# Altium PCB PCB1 -2Layer.PcbDoc
Units mil, origin at the board's own origin, x right, y up, seen from the top; angles counter-clockwise.
Board outline 4505.03 x 3000.03 mil, 2 copper layers (Component Side, Bottom Layer), stack 12.8 mil thick; 48 components, 53 nets, 188 pads, 5 vias.
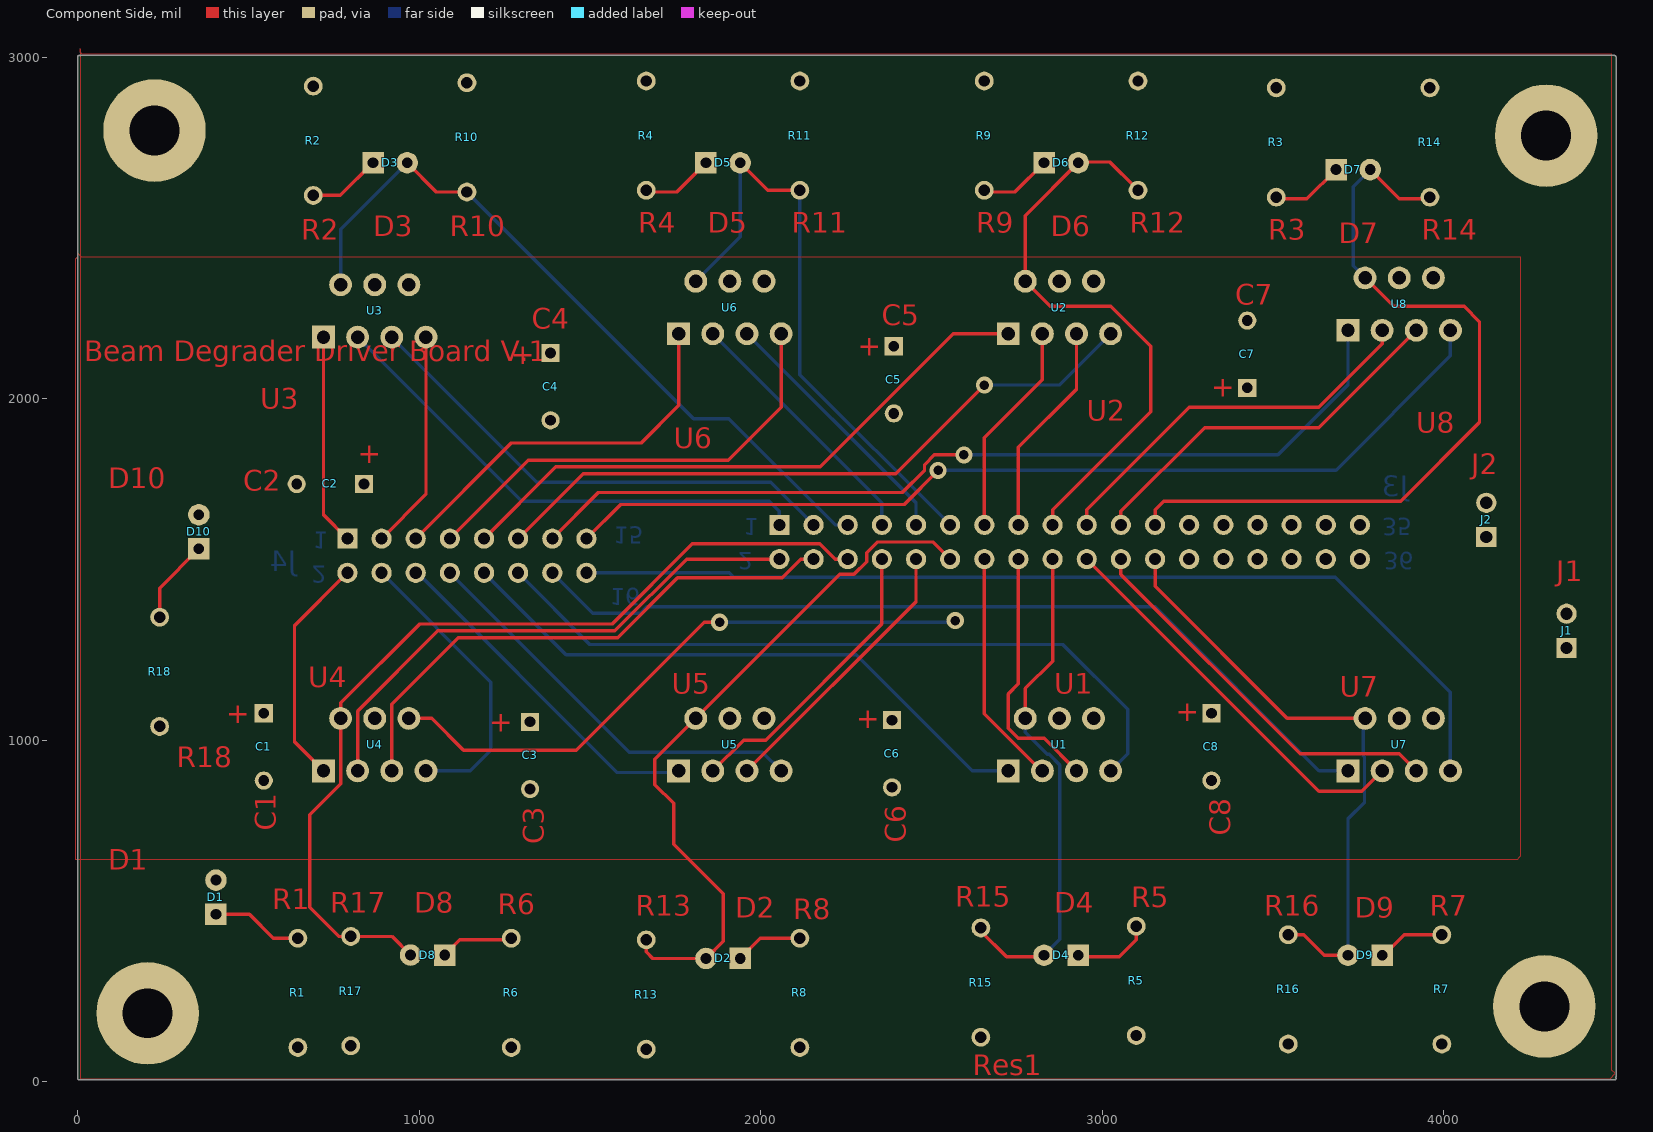
[diagram p0: Component Side view]
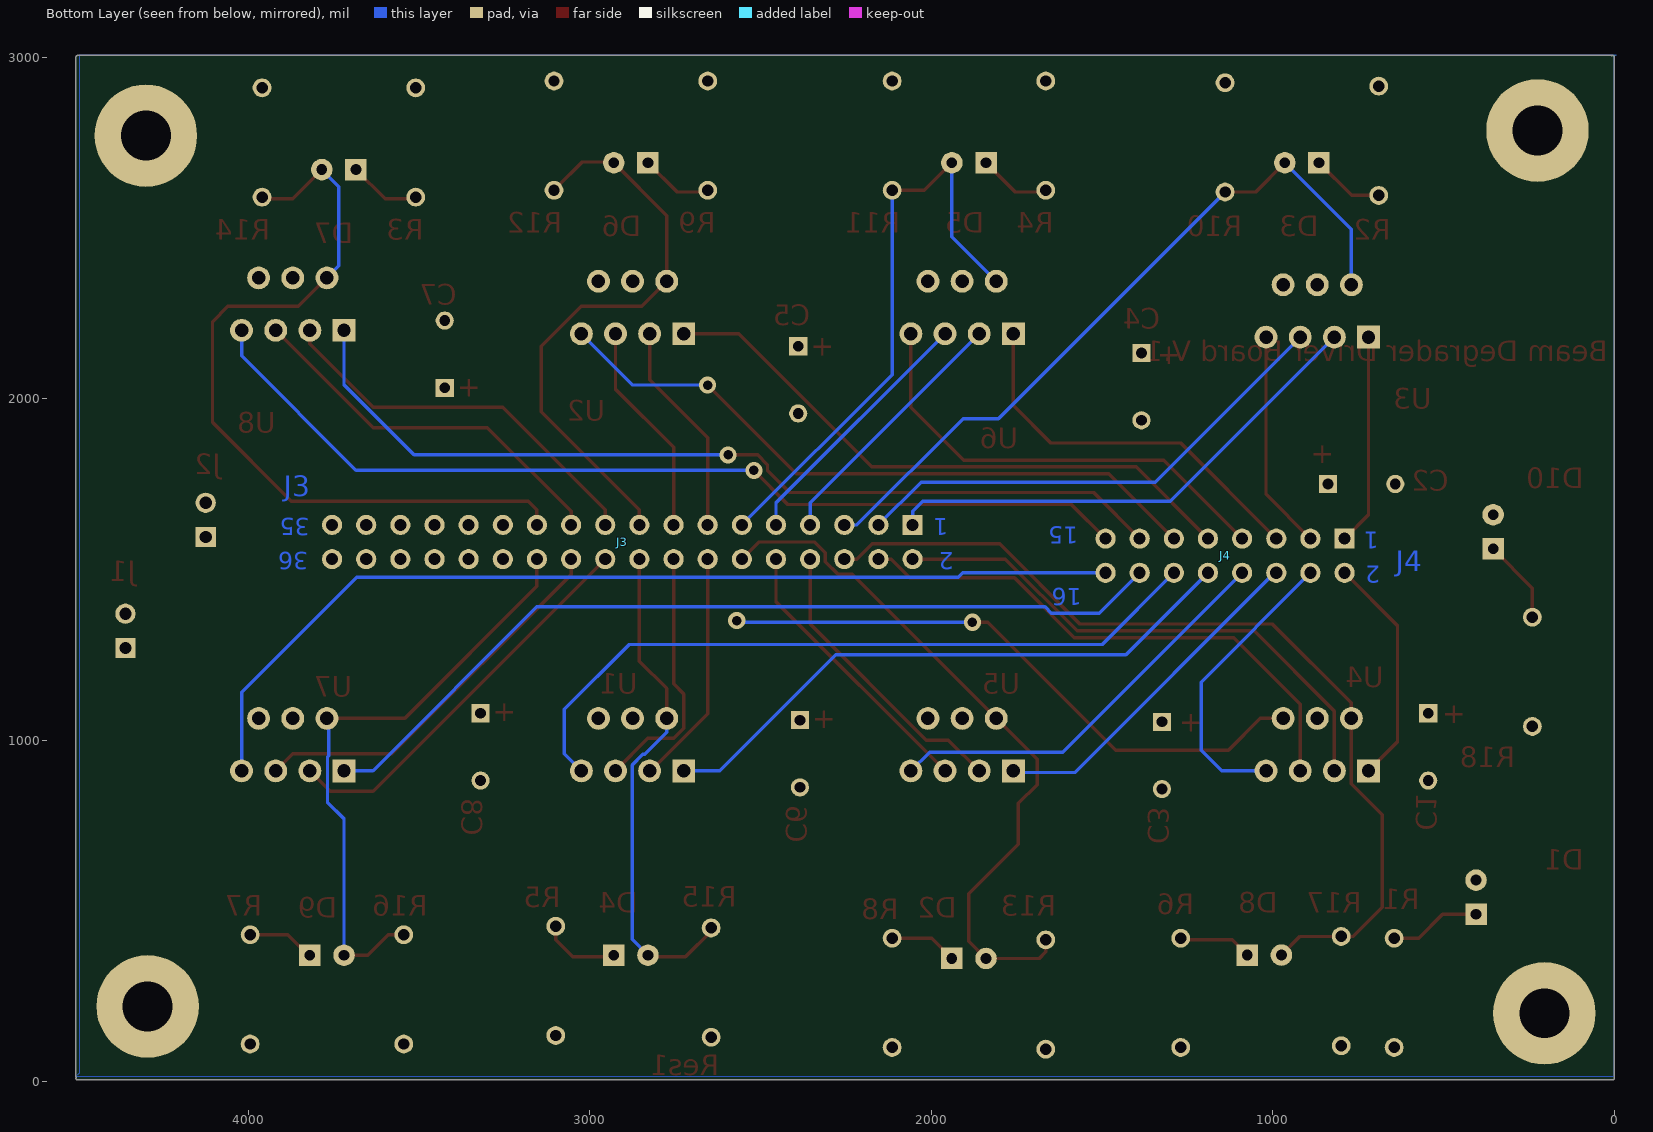
[diagram p1: Bottom Layer view, seen from below]

## Layer stack, top to bottom
Top Solder: solder mask 0.4, Solder Resist, Dk 3.5
Component Side: signal copper 1.4
Dielectric 1: core 10, FR-4, Dk 4.2
Bottom Layer: signal copper 1.4
Solder Side: solder mask 0.4, Solder Resist, Dk 3.5

## Board outline
5,4.99 cw(c5,10) -0.01,10 -0.01,3000 cw(c5,3000) 7.5,3004.35 cw(c10,3000) 10,3005.01 4500,3005.01 cw(c4500,3000) 4505.02,3000 4505.02,15 cw(c4500,15) 4504.35,12.5 cw(c4500,10) 4505.02,10 cw(c4500,10) 4500,4.99

## Design rules (kind name [scope] priority, off if disabled: settings)
AcuteAngle [All] p1: minimum=8.00000000000000E+0001 checktracksonly=FALSE
Clearance [All] p1: gap=10
HoleSize [All] p1: absolutevalues=TRUE maxlimit=200 minlimit=1 maxpercent=80.000 minpercent=20.000
PolygonConnect [All] p1: connectstyle=Relief reliefconductorwidth=10 reliefentries=4 polygonreliefangle="90 Angle" airgapwidth=10
RoutingVias [All] p1: holewidth=28 width=50 viastyle="Through Hole" minholewidth=28 minwidth=50 maxholewidth=28 maxwidth=50
SolderMaskExpansion [All] p1: expansion=4
Width [All] p1: maxlimit=30 minlimit=10 preferedwidth=10 minimp=50.000000 maximp=50.000000 favimp=50.000000
29 further rules are at their usual default settings.

## Components (designator, comment, footprint, x,y, rotation, side; value= is the part's Value field where it differs from the comment)
C1 "Cap1" "CAPR5-4X5 - no silkscreen" 545,980 r270 top
C2 "Cap1" "CAPR5-4X5 - no silkscreen" 740,1750 r180 top
C3 "Cap2" "CAPR5-4X5 - no silkscreen" 1325,955 r270 top
C4 "Cap2" "CAPR5-4X5 - no silkscreen" 1385,2035 r270 top
C5 "Cap2" "CAPR5-4X5 - no silkscreen" 2390,2055 r270 top
C6 "Cap2" "CAPR5-4X5 - no silkscreen" 2385,960 r270 top
C7 "Cap1" "CAPR5-4X5 - no silkscreen" 3425,2130 r90 top
C8 "Cap1" "CAPR5-4X5 - no silkscreen" 3320,980 r270 top
D1 "GREEN LED" "LED-1 - no silkscreen" 405,540 r180 top
D2 "RED LED" "LED-1 - no silkscreen" 1890,360.49 r270 top
D3 "RED LED" "LED-1 - no silkscreen" 915,2690.61 r90 top
D4 "RED LED" "LED-1 - no silkscreen" 2880,370 r270 top
D5 "RED LED" "LED-1 - no silkscreen" 1890,2690.61 r90 top
D6 "RED LED" "LED-1 - no silkscreen" 2880,2690.61 r90 top
D7 "RED LED" "LED-1 - no silkscreen" 3735,2670.61 r90 top
D8 "RED LED" "LED-1 - no silkscreen" 1025,370.49 r270 top
D9 "RED LED" "LED-1 - no silkscreen" 3770,370 r270 top
D10 "GREEN LED" "LED-1 - no silkscreen" 355,1610 r180 top
J1 "3.3V PS" "HDR1X2 - no silkscreen" 4360,1270 r90 top
J2 "12V PS" "HDR1X2 - no silkscreen" 4125,1595 r90 top
J3 "Header 18X2" "HDR2X18 - no silkscreen" 2055,1630 r0 bottom
J4 "Header 8X2" "HDR2X8 - no silkscreen" 790,1590 r0 bottom
R1 "Res2" "AXIAL-0.3 - no silkscreen" 645,260 r270 top
R2 "Res2" "AXIAL-0.3 - no silkscreen" 690,2755 r90 top
R3 "Res2" "AXIAL-0.3 - no silkscreen" 3510,2750 r90 top
R4 "Res2" "AXIAL-0.3 - no silkscreen" 1665,2770 r90 top
R5 "Res2" "AXIAL-0.3 - no silkscreen" 3100,295 r270 top
R6 "Res2" "AXIAL-0.3 - no silkscreen" 1270,260 r270 top
R7 "Res2" "AXIAL-0.3 - no silkscreen" 3995,270 r270 top
R8 "Res2" "AXIAL-0.3 - no silkscreen" 2115,260 r270 top
R9 "Res2" "AXIAL-0.3 - no silkscreen" 2655,2770 r90 top
R10 "Res1" "AXIAL-0.3 - no silkscreen" 1140,2765 r90 top
R11 "Res1" "AXIAL-0.3 - no silkscreen" 2115,2770 r90 top
R12 "Res1" "AXIAL-0.3 - no silkscreen" 3105,2770 r90 top
R13 "Res1" "AXIAL-0.3 - no silkscreen" 1665,255 r270 top
R14 "Res1" "AXIAL-0.3 - no silkscreen" 3960,2750 r90 top
R15 "Res1" "AXIAL-0.3 - no silkscreen" 2645,290 r270 top
R16 "Res1" "AXIAL-0.3 - no silkscreen" 3545,270 r270 top
R17 "Res1" "AXIAL-0.3 - no silkscreen" 800,265 r270 top
R18 "Res3" "AXIAL-0.3 - no silkscreen" 240,1200 r270 top
U1 "TLE 5206-2S" "TLE 5206-2 - no silkscreen" 2665,732.83 r0 top
U2 "TLE 5206-2S" "TLE 5206-2 - no silkscreen" 2665,2012.83 r0 top
U3 "TLE 5206-2S" "TLE 5206-2 - no silkscreen" 660,2002.83 r0 top
U4 "TLE 5206-2S" "TLE 5206-2 - no silkscreen" 660,732.83 r0 top
U5 "TLE 5206-2S" "TLE 5206-2 - no silkscreen" 1700,732.83 r0 top
U6 "TLE 5206-2S" "TLE 5206-2 - no silkscreen" 1700,2012.83 r0 top
U7 "TLE 5206-2S" "TLE 5206-2 - no silkscreen" 3660,732.83 r0 top
U8 "TLE 5206-2S" "TLE 5206-2 - no silkscreen" 3660,2022.83 r0 top

## Footprints (in the part's own frame and the unit in brackets; to place one, negate y for a bottom-side part, rotate by r counter-clockwise, add the part's x,y. Pads: shape width x height; smd on the part's side, far side on the other; paste and mask are expansions set on the pad)
"AXIAL-0.3 - no silkscreen" [mm] "Axial Device, Thru-Hole; 2 Leads; 0.3 in Pin Spacing"
  round 1.4 hole 0.85: 1(-4.064,0) 2(4.064,0)
"CAPR5-4X5 - no silkscreen" [mm] "Capacitor; 2 Leads"
  rect 1.35x1.35 hole 0.8: 1(-2.5,0)
  round 1.35 hole 0.8: 2(2.5,0)
"HDR1X2 - no silkscreen" [mm] "Connector; Header; 2 Position"
  rect 1.5x1.5 hole 0.9: 1(0,0)
  round 1.5 hole 0.9: 2(2.54,0)
"HDR2X8 - no silkscreen" [mm] "Connector; Header; 8x2 Position"
  rect 1.5x1.5 hole 0.9: 1(0,0)
  round 1.5 hole 0.9: 2(0,2.54) 3(2.54,0) 4(2.54,2.54) 5(5.08,0) 6(5.08,2.54) 7(7.62,0) 8(7.62,2.54) 9(10.16,0) 10(10.16,2.54) 11(12.7,0) 12(12.7,2.54) 13(15.24,0) 14(15.24,2.54) 15(17.78,0) 16(17.78,2.54)
"HDR2X18 - no silkscreen" [mm] "Connector; Header; 18x2 Position"
  rect 1.5x1.5 hole 0.9: 1(0,0)
  round 1.5 hole 0.9: 2(0,2.54) 3(2.54,0) 4(2.54,2.54) 5(5.08,0) 6(5.08,2.54) 7(7.62,0) 8(7.62,2.54) 9(10.16,0) 10(10.16,2.54) 11(12.7,0) 12(12.7,2.54) 13(15.24,0) 14(15.24,2.54) 15(17.78,0) 16(17.78,2.54) 17(20.32,0) 18(20.32,2.54) 19(22.86,0) 20(22.86,2.54) 21(25.4,0) 22(25.4,2.54) 23(27.94,0) 24(27.94,2.54) 25(30.48,0) 26(30.48,2.54) 27(33.02,0) 28(33.02,2.54) 29(35.56,0) 30(35.56,2.54) 31(38.1,0) 32(38.1,2.54) 33(40.64,0) 34(40.64,2.54) 35(43.18,0) 36(43.18,2.54)
"LED-1 - no silkscreen" [mm] "LED; 2 Leads"
  rect 1.6x1.6 hole 0.8: 1(0,1.27)
  round 1.6 hole 0.8: 2(0,-1.27)
"TLE 5206-2 - no silkscreen" [mm] "H-bridge bent legs"
  rect 1.7x1.7 hole 1: 1(1.524,4.5)
  round 1.7 hole 1: 2(2.794,8.4) 3(4.064,4.5) 4(5.334,8.4) 5(6.604,4.5) 6(7.874,8.4) 7(9.144,4.5)

## Part data
C1 C2 C7 C8: library part Cap2, "Capacitor"
C3 C4 C5 C6: "Capacitor"
D1 D2 D3 D4 D5 D6 D7 D8 D9 D10: library part LED1, "Typical RED GaAs LED"
J1 J2: library part "Header 2", "Header, 2-Pin"
J3: "Header, 18-Pin, Dual row"
J4: "Header, 8-Pin, Dual row"
R1 R2 R3 R4 R5 R6 R7 R8 R9 R18: library part Res1, "Resistor"
R10 R11 R12 R13 R14 R15 R16 R17: "Resistor"
U1 U2 U3 U4 U5 U6 U7 U8: "Infineon TLE 5206-2S Hbridge"

## Free pads (board coordinates)
  round 300 hole 146: 2(225,2785) 3(205,200) 4(4295,220) 5(4300,2770)

## Via types
v1: diameter 50, hole 28, Component Side to Bottom Layer, 5 vias

## Nets (pads, with @x,y where several pads share a name; then routed paths per layer and width w, separated by ;. In a path a pad name is that pad's centre, name@x,y a point inside that pad or via, vN(x,y) a via of type N, cw(c..) or ccw(c..) an arc to the next point about the centre after c; other vN are vias at no path point)
GND: C1.2 C2.2 C3.2 C4.2 C5.2 C6.2 C7.2 C8.2 D1.2 D10.2 J1.1 J2.1 J3.36 U1.4 U2.4 U3.4 U4.4 U5.4 U6.4 U7.4 U8.4
H1_EF: D3.2 J3.5 R10.1 U3.2 | length 2188.4
  Component Side w10: D3.2 1050.61,2605 1125,2605 R10.1@1140,2620
  Bottom Layer w10: U3.2 770,2495.61 D3.2 ; R10.1@1140,2620 R10.1 1803.43,1941.57 1906.4,1941.57 2217.97,1630 J3.5
H1_IN1: J3.1 U3.3 | length 1486.2
  Bottom Layer w10: U3.3 1300,1700 2025,1700 2055,1670 J3.1
H1_IN2: J3.3 U3.5 | length 1462.8
  Bottom Layer w10: U3.5 1345,1755 2030,1755 J3.3
H1_OUT1: J4.1 U3.1 | length 619
  Component Side w10: U3.1 720,1660 J4.1
H1_OUT2: J4.3 U3.7 | length 643.8
  Component Side w10: J4.3 1020,1720 U3.7
H2_EF: D5.2 J3.11 R11.1 U6.2 | length 1806.3
  Component Side w10: D5.2@1940,2670 D5.2 2020.61,2610 2105,2610 R11.1@2115,2620
  Bottom Layer w10: U6.2 1940,2473.54 D5.2 ; R11.1@2115,2620 R11.1 2115,2070 J3.11
H2_IN1: J3.7 U6.3 | length 765
  Bottom Layer w10: U6.3 2355,1695 J3.7
H2_IN2: J3.9 U6.5 | length 765
  Bottom Layer w10: U6.5 2455,1695 J3.9
H2_OUT1: J4.5 U6.1 | length 1141.5
  Component Side w10: J4.5 1270,1870 1650,1870 1760,1980 U6.1
H2_OUT2: J4.7 U6.7 | length 1344.5
  Component Side w10: J4.7 1320,1820 1905,1820 2060,1975 U6.7
H3_EF: D6.2 J3.17 R12.1 U2.2 | length 1705.1
  Component Side w10: J3.17 2855,1675 3141.93,1961.93 3141.93,2153.07 3025,2270 2848.54,2270 U2.2 2775,2535.61 2932.2,2692.8 3022.2,2692.8 3095,2620 R12.1@3105,2620
H3_IN1: J3.13 U2.3 | length 630.4
  Component Side w10: J3.13 2655,1885 2825,2055 U2.3
H3_IN2: J3.15 U2.5 | length 630.4
  Component Side w10: J3.15 2755,1857.22 2925,2027.22 U2.5
H3_OUT1: J4.9 U2.1 | length 1783.5
  Component Side w10: J4.9 1400,1800 2174.63,1800 2564.63,2190 U2.1
H3_OUT2: J4.11 U2.7 | length 1983.5
  Component Side w10: J4.11 1480,1780 2395.27,1780 v1(2655,2039.73)
  Bottom Layer w10: v1(2655,2039.73) 2874.73,2039.73 U2.7
H4_EF: D7.2 J3.23 R14.1 U8.2 | length 2368.4
  Component Side w10: J3.23 3155,1675 3180,1700 3875,1700 4105,1930 4105,2225 4060,2270 3853.54,2270 U8.2 ; D7.2@3785,2655 D7.2 3870.61,2585 3945,2585 R14.1@3960,2600
  Bottom Layer w10: U8.2 3735,2388.54 3735,2620.61 D7.2
H4_IN1: J3.19 U8.3 | length 1150.9
  Component Side w10: J3.19 2955,1675 3255,1975 3635,1975 3820,2160 U8.3
H4_IN2: J3.21 U8.5 | length 1124.5
  Component Side w10: J3.21 3055,1670 3300,1915 3635,1915 U8.5
H4_OUT1: J4.13 U8.1 | length 2686.1
  Component Side w10: J4.13 1525,1725 2415,1725 2480,1790 2480,1806.57 2508.43,1835 v1(2595,1835)
  Bottom Layer w10: v1(2595,1835) 3515,1835 3720,2040 U8.1
H4_OUT2: J4.15 U8.7 | length 2826.6
  Component Side w10: J4.15 1590,1690 2420,1690 v1(2520,1790)
  Bottom Layer w10: v1(2520,1790) 3685,1790 4020,2125 U8.7
H5_EF: D8.2 J3.6 R17.1 U4.2 | length 2685.2
  Component Side w10: D8.2 920.49,425 R17.1 765,425 680,510 680,781.86 770,871.86 U4.2 770,1108.82 1001.18,1340 1565,1340 1799.53,1574.53 2173.44,1574.53 2217.97,1530 J3.6
H5_IN1: J3.2 U4.3 | length 1594.5
  Component Side w10: U4.3 820,1085.26 1054.74,1320 1573.28,1320 1783.28,1530 J3.2
H5_IN2: J3.4 U4.5 | length 1606
  Component Side w10: U4.5 920,1105 1115,1300 1581.57,1300 1756.57,1475 2062.97,1475 2117.97,1530 J3.4
H5_OUT1: J4.2 U4.1 | length 679.4
  Component Side w10: U4.1 635,995 635,1335 J4.2
H5_OUT2: J4.4 U4.7 | length 867.4
  Bottom Layer w10: J4.4 1210,1170 1210,970 1150,910 U4.7
H6_EF: D2.2 J3.12 R13.1 U5.2 | length 2069.2
  Component Side w10: R13.1 1665,380 1684.51,360.49 D2.2 1890,410.49 1890,550 1745,695 1745,814.73 1690,869.73 1690,943.54 U5.2 2231.93,1485.47 2273.44,1485.47 2310.47,1522.5 2310.47,1548.44 2342.03,1580 2505,1580 J3.12
H6_IN1: J3.8 U5.3 | length 863.1
  Component Side w10: U5.3 1950,1000 2015,1000 2355,1340 J3.8
H6_IN2: J3.10 U5.5 | length 825
  Component Side w10: U5.5 2455,1405 J3.10
H6_OUT1: J4.6 U5.1 | length 1002.3
  Bottom Layer w10: J4.6@1000,1485 1580,905 1755,905 U5.1
H6_OUT2: J4.8 U5.7 | length 1210.2
  Bottom Layer w10: J4.8 1615,965 2005,965 U5.7
H7_EF: D4.2 J3.18 R15.1 U1.2 | length 1504.9
  Component Side w10: R15.1@2645,440 2720,365 2810,365 D4.2@2825.25,380.25 ; U1.2 2775,1151.19 2855,1231.19 J3.18 ; D4.2@2830,365 D4.2
  Bottom Layer w10: U1.2 2775,1022.97 2839.51,958.46 2845.07,958.46 2876.54,927 2876.54,416.54 D4.2 ; J3.18@2855,1505.47 J3.18
H7_IN1: J3.14 U1.3 | length 692.3
  Component Side w10: J3.14 2655,1076.72 2821.72,910 U1.3
H7_IN2: J3.16 U1.5 | length 783.7
  Component Side w10: J3.16 2755,1165 2725,1135 2725,1035 2755,1005 2830,1005 U1.5
  Bottom Layer w10: J3.16@2755,1505.47 J3.16
H7_OUT1: J4.10 U1.1 | length 1775.2
  Bottom Layer w10: J4.10 1430,1250 2280,1250 2620,910 U1.1
H7_OUT2: J4.12 U1.7 | length 2151.4
  Bottom Layer w10: J4.12 1500,1280 2885,1280 3075,1090 3075,960 U1.7
H8_EF: D9.2 J3.24 R16.1 U7.2 | length 1772.4
  Component Side w10: J3.24 3155,1450 3541.46,1063.54 U7.2 ; R16.1 3590,430 3650,370 D9.2
  Bottom Layer w10: D9.2 3720,770 3768.46,818.46 3768.46,949.68 3764.53,953.61 3764.53,1058.07 U7.2
H8_IN1: J3.20 U7.3 | length 1171.5
  Component Side w10: J3.20 3635,850 3760,850 U7.3
H8_IN2: J3.22 U7.5 | length 1148.2
  Component Side w10: J3.22 3055,1485 3580,960 3870,960 U7.5
H8_OUT1: J4.14 U7.1 | length 2585.1
  Bottom Layer w10: J4.14 1507.98,1372.02 1649.19,1372.02 1667.17,1390 3155,1390 3635,910 U7.1
H8_OUT2: J4.16 U7.7 | length 2905
  Bottom Layer w10: J4.16 1907.8,1490 1920.79,1477.02 3682.98,1477.02 4020,1140 U7.7
NetD1_1: D1.1 R1.1 | length 283.1
  Component Side w10: D1.1@415,480 D1.1 503.21,490 573.21,420 R1.1
NetD2_1: D2.1 R8.1 | length 199.6
  Component Side w10: D2.1 1999.51,420 R8.1
NetD3_1: D3.1 R2.1 | length 214.6
  Component Side w10: R2.1 769.39,2595 D3.1
NetD4_1: D4.1 R5.1 | length 230.7
  Component Side w10: D4.1@2930,365 3050,365 3100,415 R5.1
NetD5_1: D5.1 R4.1 | length 216.7
  Component Side w10: R4.1@1665,2620 1680,2605 1754.39,2605 D5.1
NetD6_1: D6.1 R9.1 | length 216.7
  Component Side w10: R9.1@2655,2620 2670,2605 2744.39,2605 D6.1
NetD7_1: D7.1 R3.1 | length 216.7
  Component Side w10: R3.1@3510,2600 3525,2585 3599.39,2585 D7.1
NetD8_1: D8.1 R6.1 | length 193.4
  Component Side w10: D8.1 1119.51,415 R6.1@1250,415
NetD9_1: D9.1 R7.1 | length 208.1
  Component Side w10: D9.1@3820,365 3885,430 3980,430 R7.1@3995,415
NetD10_1: D10.1 R18.1 | length 247.6
  Component Side w10: R18.1 240,1445 D10.1
"VCC 3.3V": J1.2 R1.2 R2.2 R3.2 R4.2 R5.2 R6.2 R7.2 R8.2 R9.2 R10.2 R11.2 R12.2 R13.2 R14.2 R15.2 R16.2 R17.2
"VCC 12V": C1.1 C2.1 C3.1 C4.1 C5.1 C6.1 C7.1 C8.1 J2.2 R18.2 U1.6 U2.6 U3.6 U4.6 U5.6 U6.6 U7.6 U8.6 | length 1796.1
  Component Side w10: U4.6 1036.46,1063.54 1130,970 1460,970 1835,1345 v1(1880,1345)
  Bottom Layer w10: v1(1880,1345) 2565,1345 v1(2570,1350)
pads on no net: J3.25 J3.26 J3.27 J3.28 J3.29 J3.30 J3.31 J3.32 J3.33 J3.34 J3.35

## Polygon pours and split planes (outlines as drawn)
"VCC 12V" on Component Side "12v Power Pour" (solid, remove dead copper, shelved, pour order 10): 0,2425 10,2415 4225,2415 4225,660 4220,655 4215,650 -5,650 -5,2410 0,2415
"VCC 3.3V" on Component Side "3.3 v Power Plane" (solid, remove dead copper, shelved, pour order 18): 7.81,3023.94 7.81,8.94 4487.81,8.94 4502.81,23.94 4492.81,33.94 4492.81,3008.94 12.81,3008.94 7.81,3013.94
GND on Bottom Layer "GND Power Pour" (solid, remove dead copper, shelved, pour order 12): -5,3005 4495,3005 4495,25 4505,15 0,15 0,3005

## Other copper
Component Side:
  text "+" at 2285,2125 h60
  text "Beam Degrader Driver Board V.1" at 20,2110 h60
  text "+" at 1270,2100 h60
  text "+" at 3320,2005 h60
  text "+" at 820,1810 h60
  text "+" at 3215,1055 h60
  text "+" at 435,1049.8 h60
  text "+" at 2280,1035 h60
  text "+" at 1205,1025 h60

## Silkscreen, mask and mechanical layers (free items; w line width, h text height)
Mechanical 1:
  lines w10: 5,3000 5,5 4500,5 4500,3000 10,3000 ; 3975,10 3980,15

## Text inside footprints (layer, text, board x,y; h text height)
J3: Bottom Layer "36" at 3825,1550 h50 r180; Bottom Layer "35" at 3820,1650 h50 r180; Bottom Layer "1" at 1950,1650 h50 r180; Bottom Layer "2" at 1935,1550 h50 r180
J4: Bottom Layer "16" at 1560,1445 h50 r180; Bottom Layer "15" at 1570,1625 h50 r180; Bottom Layer "1" at 690,1610 h50 r180; Bottom Layer "2" at 685,1510 h50 r180